# EAGLE board CT_schematic (EAGLE 7.6.0)

Size 100 x 80 mm. Coordinates in mm from the lower left corner, seen from the top.
Outline: 0,0 100,0 100,80 0,80 0,0
Copper layers (1*16): Top 0.035mm / dielectric 1.5mm / Bottom 0.035mm
Design rules "default": minimum track width 10mil, minimum drill 24mil, track to track 8mil, track to pad 8mil, pad to pad 8mil, via to via 8mil, smd to smd 8mil, copper to edge 40mil, drill to drill 8mil, minimum pad ring 10mil, minimum via ring 8mil, stop-mask expansion 4mil, vias tented up to drill 0mil, thermal gap 10mil

## Footprints (pad centres in the part's own frame; a part is rotated, then mirrored left to right if it is on the bottom)
C0603 = smd 0.8 x 0.8: 1 -0.762,0; 2 0.762,0
C0402 = smd 0.5 x 0.5: 1 -0.508,0; 2 0.508,0
C0805 = smd 1.2 x 1.3: 1 -1.016,0; 2 1.016,0
C1210 = smd 1.2 x 2.5: 1 -1.524,0; 2 1.524,0
R0603 = smd 0.8 x 0.8: 1 -0.762,0; 2 0.762,0
EXV-9H = smd 3.505 x 1.676: 1 -2.857,0; 2 2.857,0
L0603 = smd 0.8 x 0.8: 1 -0.762,0; 2 0.762,0
IND25X25CZ = smd 2.489 x 3.429: 1 -2.718,0; 2 2.718,0
PJ-037B_PACKAGE = drill 3.7 square: 1 12,0 | drill 3.2 square: 2 6,0
LQFP208 = smd 0.3 x 1.2: 1 -12.75,-14.4; 2 -12.25,-14.4; 3 -11.75,-14.4; 4 -11.25,-14.4; 5 -10.75,-14.4; 6 -10.25,-14.4; 7 -9.75,-14.4; 8 -9.25,-14.4; 9 -8.75,-14.4; 10 -8.25,-14.4; 11 -7.75,-14.4; 12 -7.25,-14.4; 13 -6.75,-14.4; 14 -6.25,-14.4; 15 -5.75,-14.4; 16 -5.25,-14.4; 17 -4.75,-14.4; 18 -4.25,-14.4; 19 -3.75,-14.4; 20 -3.25,-14.4; 21 -2.75,-14.4; 22 -2.25,-14.4; 23 -1.75,-14.4; 24 -1.25,-14.4; 25 -0.75,-14.4; 26 -0.25,-14.4; 27 0.25,-14.4; 28 0.75,-14.4; 29 1.25,-14.4; 30 1.75,-14.4; 31 2.25,-14.4; 32 2.75,-14.4; 33 3.25,-14.4; 34 3.75,-14.4; 35 4.25,-14.4; 36 4.75,-14.4; 37 5.25,-14.4; 38 5.75,-14.4; 39 6.25,-14.4; 40 6.75,-14.4; 41 7.25,-14.4; 42 7.75,-14.4; 43 8.25,-14.4; 44 8.75,-14.4; 45 9.25,-14.4; 46 9.75,-14.4; 47 10.25,-14.4; 48 10.75,-14.4; 49 11.25,-14.4; 50 11.75,-14.4; 51 12.25,-14.4; 52 12.75,-14.4; 105 12.75,14.4; 106 12.25,14.4; 107 11.75,14.4; 108 11.25,14.4; 109 10.75,14.4; 110 10.25,14.4; 111 9.75,14.4; 112 9.25,14.4; 113 8.75,14.4; 114 8.25,14.4; 115 7.75,14.4; 116 7.25,14.4; 117 6.75,14.4; 118 6.25,14.4; 119 5.75,14.4; 120 5.25,14.4; 121 4.75,14.4; 122 4.25,14.4; 123 3.75,14.4; 124 3.25,14.4; 125 2.75,14.4; 126 2.25,14.4; 127 1.75,14.4; 128 1.25,14.4; 129 0.75,14.4; 130 0.25,14.4; 131 -0.25,14.4; 132 -0.75,14.4; 133 -1.25,14.4; 134 -1.75,14.4; 135 -2.25,14.4; 136 -2.75,14.4; 137 -3.25,14.4; 138 -3.75,14.4; 139 -4.25,14.4; 140 -4.75,14.4; 141 -5.25,14.4; 142 -5.75,14.4; 143 -6.25,14.4; 144 -6.75,14.4; 145 -7.25,14.4; 146 -7.75,14.4; 147 -8.25,14.4; 148 -8.75,14.4; 149 -9.25,14.4; 150 -9.75,14.4; 151 -10.25,14.4; 152 -10.75,14.4; 153 -11.25,14.4; 154 -11.75,14.4; 155 -12.25,14.4; 156 -12.75,14.4 | smd 1.2 x 0.3: 53 14.4,-12.75; 54 14.4,-12.25; 55 14.4,-11.75; 56 14.4,-11.25; 57 14.4,-10.75; 58 14.4,-10.25; 59 14.4,-9.75; 60 14.4,-9.25; 61 14.4,-8.75; 62 14.4,-8.25; 63 14.4,-7.75; 64 14.4,-7.25; 65 14.4,-6.75; 66 14.4,-6.25; 67 14.4,-5.75; 68 14.4,-5.25; 69 14.4,-4.75; 70 14.4,-4.25; 71 14.4,-3.75; 72 14.4,-3.25; 73 14.4,-2.75; 74 14.4,-2.25; 75 14.4,-1.75; 76 14.4,-1.25; 77 14.4,-0.75; 78 14.4,-0.25; 79 14.4,0.25; 80 14.4,0.75; 81 14.4,1.25; 82 14.4,1.75; 83 14.4,2.25; 84 14.4,2.75; 85 14.4,3.25; 86 14.4,3.75; 87 14.4,4.25; 88 14.4,4.75; 89 14.4,5.25; 90 14.4,5.75; 91 14.4,6.25; 92 14.4,6.75; 93 14.4,7.25; 94 14.4,7.75; 95 14.4,8.25; 96 14.4,8.75; 97 14.4,9.25; 98 14.4,9.75; 99 14.4,10.25; 100 14.4,10.75; 101 14.4,11.25; 102 14.4,11.75; 103 14.4,12.25; 104 14.4,12.75; 157 -14.4,12.75; 158 -14.4,12.25; 159 -14.4,11.75; 160 -14.4,11.25; 161 -14.4,10.75; 162 -14.4,10.25; 163 -14.4,9.75; 164 -14.4,9.25; 165 -14.4,8.75; 166 -14.4,8.25; 167 -14.4,7.75; 168 -14.4,7.25; 169 -14.4,6.75; 170 -14.4,6.25; 171 -14.4,5.75; 172 -14.4,5.25; 173 -14.4,4.75; 174 -14.4,4.25; 175 -14.4,3.75; 176 -14.4,3.25; 177 -14.4,2.75; 178 -14.4,2.25; 179 -14.4,1.75; 180 -14.4,1.25; 181 -14.4,0.75; 182 -14.4,0.25; 183 -14.4,-0.25; 184 -14.4,-0.75; 185 -14.4,-1.25; 186 -14.4,-1.75; 187 -14.4,-2.25; 188 -14.4,-2.75; 189 -14.4,-3.25; 190 -14.4,-3.75; 191 -14.4,-4.25; 192 -14.4,-4.75; 193 -14.4,-5.25; 194 -14.4,-5.75; 195 -14.4,-6.25; 196 -14.4,-6.75; 197 -14.4,-7.25; 198 -14.4,-7.75; 199 -14.4,-8.25; 200 -14.4,-8.75; 201 -14.4,-9.25; 202 -14.4,-9.75; 203 -14.4,-10.25; 204 -14.4,-10.75; 205 -14.4,-11.25; 206 -14.4,-11.75; 207 -14.4,-12.25; 208 -14.4,-12.75
SOT-23-6 = smd 1.1 x 0.6: 1 -1.4,0.95; 2 -1.4,0; 3 -1.4,-0.95; 4 1.4,-0.95; 5 1.4,0; 6 1.4,0.95
TQFP64_10X10MC = smd 1.473 x 0.279: 1 -5.613,3.75; 2 -5.613,3.25; 3 -5.613,2.75; 4 -5.613,2.25; 5 -5.613,1.75; 6 -5.613,1.25; 7 -5.613,0.75; 8 -5.613,0.25; 9 -5.613,-0.25; 10 -5.613,-0.75; 11 -5.613,-1.25; 12 -5.613,-1.75; 13 -5.613,-2.25; 14 -5.613,-2.75; 15 -5.613,-3.25; 16 -5.613,-3.75; 33 5.613,-3.75; 34 5.613,-3.25; 35 5.613,-2.75; 36 5.613,-2.25; 37 5.613,-1.75; 38 5.613,-1.25; 39 5.613,-0.75; 40 5.613,-0.25; 41 5.613,0.25; 42 5.613,0.75; 43 5.613,1.25; 44 5.613,1.75; 45 5.613,2.25; 46 5.613,2.75; 47 5.613,3.25; 48 5.613,3.75 | smd 0.279 x 1.473: 17 -3.75,-5.613; 18 -3.25,-5.613; 19 -2.75,-5.613; 20 -2.25,-5.613; 21 -1.75,-5.613; 22 -1.25,-5.613; 23 -0.75,-5.613; 24 -0.25,-5.613; 25 0.25,-5.613; 26 0.75,-5.613; 27 1.25,-5.613; 28 1.75,-5.613; 29 2.25,-5.613; 30 2.75,-5.613; 31 3.25,-5.613; 32 3.75,-5.613; 49 3.75,5.613; 50 3.25,5.613; 51 2.75,5.613; 52 2.25,5.613; 53 1.75,5.613; 54 1.25,5.613; 55 0.75,5.613; 56 0.25,5.613; 57 -0.25,5.613; 58 -0.75,5.613; 59 -1.25,5.613; 60 -1.75,5.613; 61 -2.25,5.613; 62 -2.75,5.613; 63 -3.25,5.613; 64 -3.75,5.613
7498011122R = smd 0.71 x 2.29: 1 -3.545,-3.18; 2 -2.525,-3.18; 3 -1.505,-3.18; 4 -0.485,-3.18; 5 0.535,-3.18; 6 1.555,-3.18; 8 3.595,-3.18; 9 5.635,-3.18; 10 6.655,-3.18; 11 -6.605,-3.18; 12 -5.585,-3.18 | smd 1.4 x 2.54: 13 -8.51,10.2; 14 8.51,10.2 | hole 1.4: -3.5,0; 3.5,0
TST-110-05-T-D-RA = drill 1 pad 1.7 square: 1 0,0 | drill 1 pad 1.7: 2 0,2.54; 3 2.54,0; 4 2.54,2.54; 5 5.08,0; 6 5.08,2.54; 7 7.62,0; 8 7.62,2.54; 9 10.16,0; 10 10.16,2.54; 11 12.7,0; 12 12.7,2.54; 13 15.24,0; 14 15.24,2.54; 15 17.78,0; 16 17.78,2.54; 17 20.32,0; 18 20.32,2.54; 19 22.86,0; 20 22.86,2.54
MICRO_USB_AB = smd 0.4 x 1.35: 1 1.3,0.26; 2 0.65,0.26; 3 0,0.26; 4 -0.65,0.26; 5 -1.3,0.26 | drill 0.6 pad 0.95 long: 6 4.175,-2.54; 7 -4.175,-2.54 | drill 0.7 pad 1.1 long: 8 -2.225,0.46; 9 2.225,0.46
SOT143B = smd 1 x 0.7: 1 -0.75,-1 | smd 0.6 x 0.7: 2 0.95,-1; 3 0.95,1; 4 -0.95,1
ABS07-32.768KHZ-7-T = smd 1.1 x 2.4: 1 -2.5,0; 2 0,0
ABLS-25.000MHZ-B2F-T = smd 5.6 x 2.8: 1 -3.81,0; 2 5.69,0
ASFL1 = smd 1.7 x 1.5: 1 -1.27,-1.1; 2 1.27,-1.1; 3 1.27,1.1; 4 -1.27,1.1
IR3899MTR1PBF = smd 0.25 x 0.75: 1 0,0; 2 0.5,0; 3 1,0; 4 1.5,0; 5 2,0; 6 2.5,0; 7 3,0 | smd 0.75 x 0.25: 8 3.425,0.78; 9 3.425,1.28; 10 3.425,1.78; 14 -0.425,1.78; 15 -0.425,1.28; 16 -0.425,0.78 | smd 0.3 x 1.95: 11 3.22,3.63 | smd 1.62 x 2.42: 12 1.786,3.8 | smd 1 x 1.95: 13 0.117,3.63 | smd 2.19 x 1.25: 17 1.51,1.26
SON-6 = smd 0.55 x 0.3: 1 -0.355,0.5 | smd 0.52 x 0.3: 2 -0.37,0; 3 -0.37,-0.5; 4 0.37,-0.5; 5 0.37,0; 6 0.37,0.5
SW_4-1437565-2 = smd 1.4 x 2.1: 1 -2.23,4.55; 2 -2.23,-4.55; 3 2.23,4.55; 4 2.23,-4.55
LGM67K-G1J2-24-Z = smd 0.8 x 1.4: A -2,0; C 0,0
NC7SZ125M5X = smd 1.3 x 0.7: 1 -1.3,0.95; 2 -1.3,0; 3 -1.3,-0.95; 4 1.3,-0.95; 5 1.3,0.95

## Placement (x,y rotation side)
C1  1e-06  [C0603]  -45.72,81.28 0 top  (outside the outline)
C2  1e-07  [C0603]  -49.53,81.28 0 top  (outside the outline)
C3  1e-07  [C0603]  -53.34,81.28 0 top  (outside the outline)
C4  1e-07  [C0603]  -57.15,81.28 0 top  (outside the outline)
C5  1e-07  [C0603]  -60.96,81.28 0 top  (outside the outline)
C6  1e-07  [C0603]  -64.77,81.28 0 top  (outside the outline)
C7  1e-07  [C0603]  -68.58,81.28 0 top  (outside the outline)
C8  1e-07  [C0603]  -72.39,81.28 0 top  (outside the outline)
C9  1e-07  [C0603]  -76.2,81.28 0 top  (outside the outline)
C10  1e-07  [C0603]  -80.01,81.28 0 top  (outside the outline)
C11  1e-07  [C0603]  -83.82,81.28 0 top  (outside the outline)
C12  1e-07  [C0603]  -87.63,81.28 0 top  (outside the outline)
C13  1e-07  [C0603]  -15.24,86.36 0 top  (outside the outline)
C14  1e-07  [C0603]  -19.05,86.36 0 top  (outside the outline)
C15  1e-07  [C0603]  -22.86,86.36 0 top  (outside the outline)
C16  1e-07  [C0603]  -26.67,86.36 0 top  (outside the outline)
C17  1e-07  [C0603]  -30.48,86.36 0 top  (outside the outline)
C18  1e-07  [C0603]  -34.29,86.36 0 top  (outside the outline)
C19  1e-07  [C0603]  -38.1,86.36 0 top  (outside the outline)
C20  4.7e-06  [C0603]  -19.05,81.28 0 top  (outside the outline)
C21  2.2e-09  [C0603]  -22.86,81.28 0 top  (outside the outline)
C22  2.2e-09  [C0603]  -26.67,81.28 0 top  (outside the outline)
C23  1e-08  [C0603]  -41.91,86.36 0 top  (outside the outline)
C24  1e-06  [C0603]  -45.72,86.36 0 top  (outside the outline)
C25  1e-11  [C0402]  -54.61,91.44 0 top  (outside the outline)
C26  1e-11  [C0402]  -58.42,91.44 0 top  (outside the outline)
C27  1.8e-08  [C0402]  -43.18,91.44 0 top  (outside the outline)
C28  2.2e-06  [C0603]  -30.48,81.28 0 top  (outside the outline)
C29  1e-07  [C0402]  -62.23,91.44 0 top  (outside the outline)
C30  1e-08  [C0402]  -66.04,91.44 0 top  (outside the outline)
C31  2.2e-06  [C0603]  -34.29,81.28 0 top  (outside the outline)
C32  1e-07  [C0402]  -69.85,91.44 0 top  (outside the outline)
C33  1e-08  [C0402]  -73.66,91.44 0 top  (outside the outline)
C34  1e-07  [C0402]  -77.47,91.44 0 top  (outside the outline)
C35  1e-07  [C0402]  -81.28,91.44 0 top  (outside the outline)
C36  1e-05  [C0805]  -45.72,64.77 0 top  (outside the outline)
C37  1e-07  [C0402]  -85.09,91.44 0 top  (outside the outline)
C38  1e-07  [C0402]  -88.9,91.44 0 top  (outside the outline)
C39  1e-07  [C0402]  -15.24,96.52 0 top  (outside the outline)
C40  1e-08  [C0402]  -19.05,96.52 0 top  (outside the outline)
C41  0.0001  [C1210]  -86.36,57.15 0 top  (outside the outline)
C42  2.2e-06  [C0603]  -38.1,81.28 0 top  (outside the outline)
C43  1e-07  [C0402]  -22.86,96.52 0 top  (outside the outline)
C44  1e-07  [C0402]  -26.67,96.52 0 top  (outside the outline)
C45  8.2e-09  [C0402]  -46.99,91.44 0 top  (outside the outline)
C46  2.7406851011734e-07  [R0603]  -55.88,64.77 0 top  (outside the outline)
C49  0.0001  [C1210]  -16.51,66.04 0 top  (outside the outline)
C50  2.2e-06  [C0603]  -41.91,81.28 0 top  (outside the outline)
C51  1e-07  [C0402]  -30.48,96.52 0 top  (outside the outline)
C52  1e-07  [C0402]  -34.29,96.52 0 top  (outside the outline)
C53  8.2e-09  [C0402]  -50.8,91.44 0 top  (outside the outline)
C54  2.7406851011734e-07  [R0603]  -66.04,64.77 0 top  (outside the outline)
C57  1e-07  [C0402]  -38.1,96.52 0 top  (outside the outline)
C58  0.0001  [EXV-9H]  -72.39,49.53 0 top  (outside the outline)
C59  0.0001  [EXV-9H]  -83.82,49.53 0 top  (outside the outline)
C60  1e-08  [C0402]  -41.91,96.52 0 top  (outside the outline)
C61  1e-08  [C0402]  -45.72,96.52 0 top  (outside the outline)
C62  1e-08  [C0402]  -49.53,96.52 0 top  (outside the outline)
F1  240.0  [L0603]  -49.53,86.36 0 top  (outside the outline)
F2  510.0  [L0603]  -53.34,86.36 0 top  (outside the outline)
I1  6.8e-07  [IND25X25CZ]  -38.1,58.42 0 top  (outside the outline)
I2  6.8e-07  [IND25X25CZ]  -46.99,58.42 0 top  (outside the outline)
J1  PJ-037B  [PJ-037B_PACKAGE]  -27.94,38.1 0 top  (outside the outline)
R2  1000.0  [R0603]  -57.15,86.36 0 top  (outside the outline)
R4  4700.0  [R0603]  -60.96,86.36 0 top  (outside the outline)
R5  4700.0  [R0603]  -64.77,86.36 0 top  (outside the outline)
R6  2200.0  [R0603]  -68.58,86.36 0 top  (outside the outline)
R7  2200.0  [R0603]  -72.39,86.36 0 top  (outside the outline)
R8  47000.0  [R0603]  -57.15,71.12 0 top  (outside the outline)
R9  10000.0  [R0603]  -62.23,71.12 0 top  (outside the outline)
R10  10000.0  [R0603]  -67.31,71.12 0 top  (outside the outline)
R11  10000.0  [R0603]  -72.39,71.12 0 top  (outside the outline)
R12  10000.0  [R0603]  -77.47,71.12 0 top  (outside the outline)
R13  10000.0  [R0603]  -82.55,71.12 0 top  (outside the outline)
R14  0.1  [R0603]  -76.2,86.36 0 top  (outside the outline)
R15  0.1  [R0603]  -80.01,86.36 0 top  (outside the outline)
R16  200.0  [R0603]  -83.82,86.36 0 top  (outside the outline)
R17  200.0  [R0603]  -87.63,86.36 0 top  (outside the outline)
R18  10000.0  [R0603]  -87.63,71.12 0 top  (outside the outline)
R19  10000.0  [R0603]  -15.24,76.2 0 top  (outside the outline)
R20  10000.0  [R0603]  -20.32,76.2 0 top  (outside the outline)
R21  1270.0  [R0603]  -15.24,91.44 0 top  (outside the outline)
R22  10000.0  [R0603]  -25.4,76.2 0 top  (outside the outline)
R23  10000.0  [R0603]  -30.48,76.2 0 top  (outside the outline)
R24  10000.0  [R0603]  -35.56,76.2 0 top  (outside the outline)
R25  10000.0  [R0603]  -40.64,76.2 0 top  (outside the outline)
R26  10000.0  [R0603]  -45.72,76.2 0 top  (outside the outline)
R27  10000.0  [R0603]  -50.8,76.2 0 top  (outside the outline)
R28  10000.0  [R0603]  -55.88,76.2 0 top  (outside the outline)
R29  10000.0  [R0603]  -60.96,76.2 0 top  (outside the outline)
R30  0.1  [R0603]  -19.05,91.44 0 top  (outside the outline)
R31  4030.2416170974  [R0603]  -73.66,64.77 0 top  (outside the outline)
R32  719.68600305311  [R0603]  -81.28,64.77 0 top  (outside the outline)
R33  63.40896969697  [R0603]  -34.29,71.12 0 top  (outside the outline)
R34  130.0  [R0603]  -22.86,91.44 0 top  (outside the outline)
R35  39000.0  [R0603]  -66.04,76.2 0 top  (outside the outline)
R36  49900.0  [R0603]  -71.12,76.2 0 top  (outside the outline)
R37  5251.2214765101  [R0603]  -88.9,64.77 0 top  (outside the outline)
R38  0.1  [R0603]  -26.67,91.44 0 top  (outside the outline)
R39  4030.2416170974  [R0603]  -19.05,71.12 0 top  (outside the outline)
R40  453.0  [R0603]  -30.48,91.44 0 top  (outside the outline)
R41  63.40896969697  [R0603]  -41.91,71.12 0 top  (outside the outline)
R42  130.0  [R0603]  -34.29,91.44 0 top  (outside the outline)
R43  39000.0  [R0603]  -76.2,76.2 0 top  (outside the outline)
R44  49900.0  [R0603]  -81.28,76.2 0 top  (outside the outline)
R45  5251.2214765101  [R0603]  -26.67,71.12 0 top  (outside the outline)
R46  10000.0  [R0603]  -86.36,76.2 0 top  (outside the outline)
R47  10000.0  [R0603]  -15.24,81.28 0 top  (outside the outline)
R48  9100.0  [R0603]  -38.1,91.44 0 top  (outside the outline)
R49  680000.0  [R0603]  -46.99,71.12 0 top  (outside the outline)
R50  120000.0  [R0603]  -52.07,71.12 0 top  (outside the outline)
U1  STM32F429BIT6  [LQFP208]  -27.94,15.24 0 top  (outside the outline)
U2  MAX4995AAUT+T  [SOT-23-6]  -21.59,64.77 0 top  (outside the outline)
U3  BCM5221KPT  [TQFP64_10X10MC]  -69.85,7.62 0 top  (outside the outline)
U4  7498011122R  [7498011122R]  -53.34,7.62 0 top  (outside the outline)
U5  TST-110-05-T-D-RA  [TST-110-05-T-D-RA]  -64.77,46.99 0 top  (outside the outline)
U6  47590-0001  [MICRO_USB_AB]  -36.83,38.1 0 top  (outside the outline)
U7  prtr5v0u2ax  [SOT143B]  -62.23,96.52 0 top  (outside the outline)
U8  ABS07-32.768KHZ-7-T  [ABS07-32.768KHZ-7-T]  -66.04,58.42 0 top  (outside the outline)
U9  ABLS-25.000MHZ-B2F-T  [ABLS-25.000MHZ-B2F-T]  -26.67,58.42 0 top  (outside the outline)
U10  ASFL1-25MHZ-NCS  [ASFL1]  -26.67,49.53 0 top  (outside the outline)
U11  IR3899MTR1PBF  [IR3899MTR1PBF]  -73.66,33.02 0 top  (outside the outline)
U12  IR3899MTR1PBF  [IR3899MTR1PBF]  -88.9,33.02 0 top  (outside the outline)
U13  TPS3895ADRYR  [SON-6]  -66.04,95.25 0 top  (outside the outline)
U14  4-1437565-2  [SW_4-1437565-2]  -57.15,36.83 0 top  (outside the outline)
U15  Q65110A2395  [LGM67K-G1J2-24-Z]  -74.93,57.15 0 top  (outside the outline)
U16  nc7sz125m5x  [NC7SZ125M5X]  -26.67,64.77 0 top  (outside the outline)
U17  nc7sz125m5x  [NC7SZ125M5X]  -33.02,64.77 0 top  (outside the outline)
U18  nc7sz125m5x  [NC7SZ125M5X]  -39.37,64.77 0 top  (outside the outline)

## Library data of the parts
C1-C46 C49-C54 C57-C62 F1 F2 I1 I2 J1 R2 R4-R50 U1-U18 = circuit_tree

## Nets
CLK_CRYSTAL_U1_9: C25.1 U1.9 U8.1
CLK_CRYSTAL_U1_10: C26.1 U1.10 U8.2
CLK_CRYSTAL_U3_5: U3.5 U9.2
CLK_CRYSTAL_U3_6: U3.6 U9.1
CLK_U1_32: U1.32 U10.3
GND: C1.2 C2.2 C3.2 C4.2 C5.2 C6.2 C7.2 C8.2 C9.2 C10.2 C11.2 C12.2 C13.2 C14.2 C15.2 C16.2 C17.2 C18.2 C19.2 C20.2 C21.2 C22.2 C23.2 C24.2 C25.2 C26.2 C27.2 C28.2 C29.2 C30.2 C31.2 C32.2 C33.2 C34.2 C35.2 C36.2 C37.2 C38.2 C39.2 C40.2 C42.2 C43.2 C44.2 C50.2 C51.2 C52.2 C57.2 C58.2 C59.2 C60.2 C61.2 C62.2 J1.2 R2.2 R8.2 R13.2 R14.2 R15.2 R18.2 R20.2 R21.2 R22.2 R24.2 R25.2 R26.2 R30.1 R30.2 R32.2 R35.2 R37.2 R38.1 R38.2 R40.2 R43.2 R45.2 R48.2 R50.2 U1.14 U1.25 U1.40 U1.51 U1.60 U1.72 U1.82 U1.93 U1.114 U1.125 U1.136 U1.149 U1.170 U1.184 U1.202 U2.2 U3.7 U3.24 U3.29 U3.32 U3.40 U3.45 U3.54 U3.63 U4.10 U4.12 U5.4 U5.6 U5.8 U5.10 U5.12 U5.14 U5.16 U5.18 U5.20 U6.5 U6.6 U6.7 U6.8 U6.9 U7.1 U10.2 U11.4 U11.11 U11.17 U12.4 U12.11 U12.17 U13.2 U15.C U16.2 U16.3 U17.1 U17.3 U18.1 U18.3
NET_U1_34: R5.1 U1.34 U18.4
NET_U1_36: R6.1 U1.36 U3.42
NET_U1_42: C23.1 C24.1 F1.1 U1.41 U1.42
NET_U1_45: R7.1 U1.45 U3.41
NET_U1_63: R11.1 U1.63
NET_U1_92: C21.1 U1.92
NET_U1_148: C22.1 U1.148
NET_U1_197: R10.1 U1.197
NET_U1_203: R9.1 U1.203
NET_U1_207: U15.A
NET_U1_208: U14.3 U14.4
NET_U2_3: R8.1 U2.3
NET_U3_2: C31.1 C32.1 C33.1 U3.2 U3.55
NET_U3_9: R4.1 U3.9 U17.4
NET_U3_10: R22.1 U3.10
NET_U3_11: R23.1 U3.11
NET_U3_12: R24.1 U3.12
NET_U3_13: R25.1 U3.13
NET_U3_14: R26.1 U3.14
NET_U3_16: R20.1 U3.16
NET_U3_18: R28.1 U3.18
NET_U3_20: U3.20
NET_U3_23: R21.1 U3.23
NET_U3_27: C28.1 C29.1 C30.1 U3.22 U3.27 U3.28
NET_U3_37: R27.1 U3.37
NET_U3_38: R18.1 U3.38
NET_U3_39: R19.1 U3.39
NET_U4_1: U3.31 U4.1
NET_U4_2: F2.2 U4.2
NET_U4_3: U3.30 U4.3
NET_U4_4: U3.26 U4.4
NET_U4_5: C27.1 F2.1 U4.2 U4.5
NET_U4_6: U3.25 U4.6
NET_U4_8: R15.1 U4.8
NET_U4_9: R16.1 U4.9
NET_U4_11: R17.1 U4.11
NET_U4_12: R16.2 U4.12
NET_U4_13: R14.1 U4.13 U4.14
NET_U4_35: R17.2
NET_U11_1: C45.1 R31.1 R32.1 R33.1 R34.1 U11.1 U11.8
NET_U11_2: C44.1 U11.2
NET_U11_3: C45.2 C46.1 C46.2 U11.3
NET_U11_5: R35.1 U11.5
NET_U11_10: C42.1 U11.10
NET_U11_12: C41.1 I1.1 U11.12
NET_U11_13: U11.13
NET_U11_14: C41.2 U11.14
NET_U11_15: R36.1 R37.1 U11.15
NET_U11_ATNET_3: I1.2 R31.2
NET_U11_ATNET_4: C46.2 R33.2
NET_U11_ATNET_5: R34.2
NET_U12_1: C53.1 R39.1 R40.1 R41.1 R42.1 U12.1 U12.8
NET_U12_2: C52.1 U12.2
NET_U12_3: C53.2 C54.1 C54.2 U12.3
NET_U12_5: R43.1 U12.5
NET_U12_10: C50.1 U12.10
NET_U12_12: C49.1 I2.1 U12.12
NET_U12_13: U12.13
NET_U12_14: C49.2 U12.14
NET_U12_15: R44.1 R45.1 U12.15
NET_U12_ATNET_3: I2.2 R39.2
NET_U12_ATNET_4: C54.2 R41.2
NET_U12_ATNET_5: R42.2
NET_U13_1: R47.1 R48.1 U13.1
NET_U13_3: R49.2 R50.1 U13.3
NET_U13_4: R46.1 U13.4 U16.4 U17.2 U18.2
NET_U14_1: R2.1 U14.1 U14.2
PROC_ETH_COL: U1.47 U3.61
PROC_ETH_CRS: U1.43 U3.62
PROC_ETH_RX_CLK: U1.44 U3.50
PROC_ETH_RX_DV: U1.56 U3.49
PROC_ETH_RX_ER: U1.12 U3.51
PROC_ETH_RXD0: U1.57 U3.48
PROC_ETH_RXD1: U1.58 U3.47
PROC_ETH_RXD2: U1.61 U3.44
PROC_ETH_RXD3: U1.62 U3.43
PROC_ETH_TX_CLK: U1.38 U3.53
PROC_ETH_TX_EN: U1.91 U3.56
PROC_ETH_TXD0: U1.104 U3.57
PROC_ETH_TXD1: U1.105 U3.58
PROC_ETH_TXD2: U1.37 U3.59
PROC_ETH_TXD3: U1.1 U3.60
PROC_GPIO_TO_U1_USB_FAULT: R12.1 U1.3 U2.6
PROC_GPIO_TO_U1_VBUS_EN: R13.1 U1.2 U2.4
PROC_SYS_JTCK_SWCLK: U1.159 U5.9
PROC_SYS_JTDO_SWO: U1.192 U5.13
PROC_SYS_JTMS_SWDIO: U1.147 U5.7
PROC_USB_OTG_FS_DM: U1.145 U6.2 U7.3
PROC_USB_OTG_FS_DP: U1.146 U6.3 U7.2
PROC_USB_OTG_FS_ID: U1.144 U6.4
PROC_USB_OTG_FS_VBUS: U1.143 U2.1 U6.1 U7.4
RST_OUT_U5_SRESET_B: R29.1 U5.15 U16.1
VCC_S1_16V5: C43.1 C51.1 C58.1 C59.1 J1.1 R36.2 R44.2 U11.9 U12.9
VCC_TIER1_3V3: C1.1 C2.1 C3.1 C4.1 C5.1 C6.1 C7.1 C8.1 C9.1 C10.1 C11.1 C12.1 C13.1 C14.1 C15.1 C16.1 C17.1 C18.1 C19.1 C20.1 C34.1 C35.1 C36.1 C37.1 C38.1 C39.1 C40.1 C57.1 C60.1 C61.1 C62.1 F1.2 I1.2 R4.2 R5.2 R6.2 R7.2 R9.2 R10.2 R11.2 R12.2 R19.2 R23.2 R27.2 R28.2 R29.2 R31.2 R46.2 R47.2 R49.1 U1.6 U1.15 U1.26 U1.39 U1.52 U1.59 U1.73 U1.83 U1.94 U1.103 U1.115 U1.124 U1.137 U1.150 U1.158 U1.171 U1.185 U1.204 U3.1 U3.3 U3.46 U5.1 U10.4 U13.6 U16.5 U17.5 U18.5
VCC_TIER1_5V0: I2.2 R39.2 U2.5

## Tracks (layer width: path | path; a pad name or v marks a point on that pad's centre or on a via)
CLK_CRYSTAL_U1_9  (2 unrouted)
CLK_CRYSTAL_U1_10  (2 unrouted)
CLK_CRYSTAL_U3_5  (1 unrouted)
CLK_CRYSTAL_U3_6  (1 unrouted)
CLK_U1_32  (1 unrouted)
GND  (132 unrouted)
NET_U1_34  (2 unrouted)
NET_U1_36  (2 unrouted)
NET_U1_42  (4 unrouted)
NET_U1_45  (2 unrouted)
NET_U1_63  (1 unrouted)
NET_U1_92  (1 unrouted)
NET_U1_148  (1 unrouted)
NET_U1_197  (1 unrouted)
NET_U1_203  (1 unrouted)
NET_U1_208  (1 unrouted)
NET_U2_3  (1 unrouted)
NET_U3_2  (4 unrouted)
NET_U3_9  (2 unrouted)
NET_U3_10  (1 unrouted)
NET_U3_11  (1 unrouted)
NET_U3_12  (1 unrouted)
NET_U3_13  (1 unrouted)
NET_U3_14  (1 unrouted)
NET_U3_16  (1 unrouted)
NET_U3_18  (1 unrouted)
NET_U3_23  (1 unrouted)
NET_U3_27  (5 unrouted)
NET_U3_37  (1 unrouted)
NET_U3_38  (1 unrouted)
NET_U3_39  (1 unrouted)
NET_U4_1  (1 unrouted)
NET_U4_2  (1 unrouted)
NET_U4_3  (1 unrouted)
NET_U4_4  (1 unrouted)
NET_U4_5  (3 unrouted)
NET_U4_6  (1 unrouted)
NET_U4_8  (1 unrouted)
NET_U4_9  (1 unrouted)
NET_U4_11  (1 unrouted)
NET_U4_12  (1 unrouted)
NET_U4_13  (2 unrouted)
NET_U11_1  (6 unrouted)
NET_U11_2  (1 unrouted)
NET_U11_3  (3 unrouted)
NET_U11_5  (1 unrouted)
NET_U11_10  (1 unrouted)
NET_U11_12  (2 unrouted)
NET_U11_14  (1 unrouted)
NET_U11_15  (2 unrouted)
NET_U11_ATNET_3  (1 unrouted)
NET_U11_ATNET_4  (1 unrouted)
NET_U12_1  (6 unrouted)
NET_U12_2  (1 unrouted)
NET_U12_3  (3 unrouted)
NET_U12_5  (1 unrouted)
NET_U12_10  (1 unrouted)
NET_U12_12  (2 unrouted)
NET_U12_14  (1 unrouted)
NET_U12_15  (2 unrouted)
NET_U12_ATNET_3  (1 unrouted)
NET_U12_ATNET_4  (1 unrouted)
NET_U13_1  (2 unrouted)
NET_U13_3  (2 unrouted)
NET_U13_4  (4 unrouted)
NET_U14_1  (2 unrouted)
PROC_ETH_COL  (1 unrouted)
PROC_ETH_CRS  (1 unrouted)
PROC_ETH_RX_CLK  (1 unrouted)
PROC_ETH_RX_DV  (1 unrouted)
PROC_ETH_RX_ER  (1 unrouted)
PROC_ETH_RXD0  (1 unrouted)
PROC_ETH_RXD1  (1 unrouted)
PROC_ETH_RXD2  (1 unrouted)
PROC_ETH_RXD3  (1 unrouted)
PROC_ETH_TX_CLK  (1 unrouted)
PROC_ETH_TX_EN  (1 unrouted)
PROC_ETH_TXD0  (1 unrouted)
PROC_ETH_TXD1  (1 unrouted)
PROC_ETH_TXD2  (1 unrouted)
PROC_ETH_TXD3  (1 unrouted)
PROC_GPIO_TO_U1_USB_FAULT  (2 unrouted)
PROC_GPIO_TO_U1_VBUS_EN  (2 unrouted)
PROC_SYS_JTCK_SWCLK  (1 unrouted)
PROC_SYS_JTDO_SWO  (1 unrouted)
PROC_SYS_JTMS_SWDIO  (1 unrouted)
PROC_USB_OTG_FS_DM  (2 unrouted)
PROC_USB_OTG_FS_DP  (2 unrouted)
PROC_USB_OTG_FS_ID  (1 unrouted)
PROC_USB_OTG_FS_VBUS  (3 unrouted)
RST_OUT_U5_SRESET_B  (2 unrouted)
VCC_S1_16V5  (8 unrouted)
VCC_TIER1_3V3  (76 unrouted)
VCC_TIER1_5V0  (2 unrouted)